# Altium PCB ESP32 with USBC V1I1.PcbDoc (part 3 of 3)
Units mil, origin at the board's own origin, x right, y up, seen from the top; angles counter-clockwise.
Board outline 2700 x 1000 mil, 4 copper layers (L1, L2, L3, L4), stack 61.583 mil thick; 64 components, 73 nets, 299 pads, 159 vias.
Unrouted connection lines stored in the file: 15.
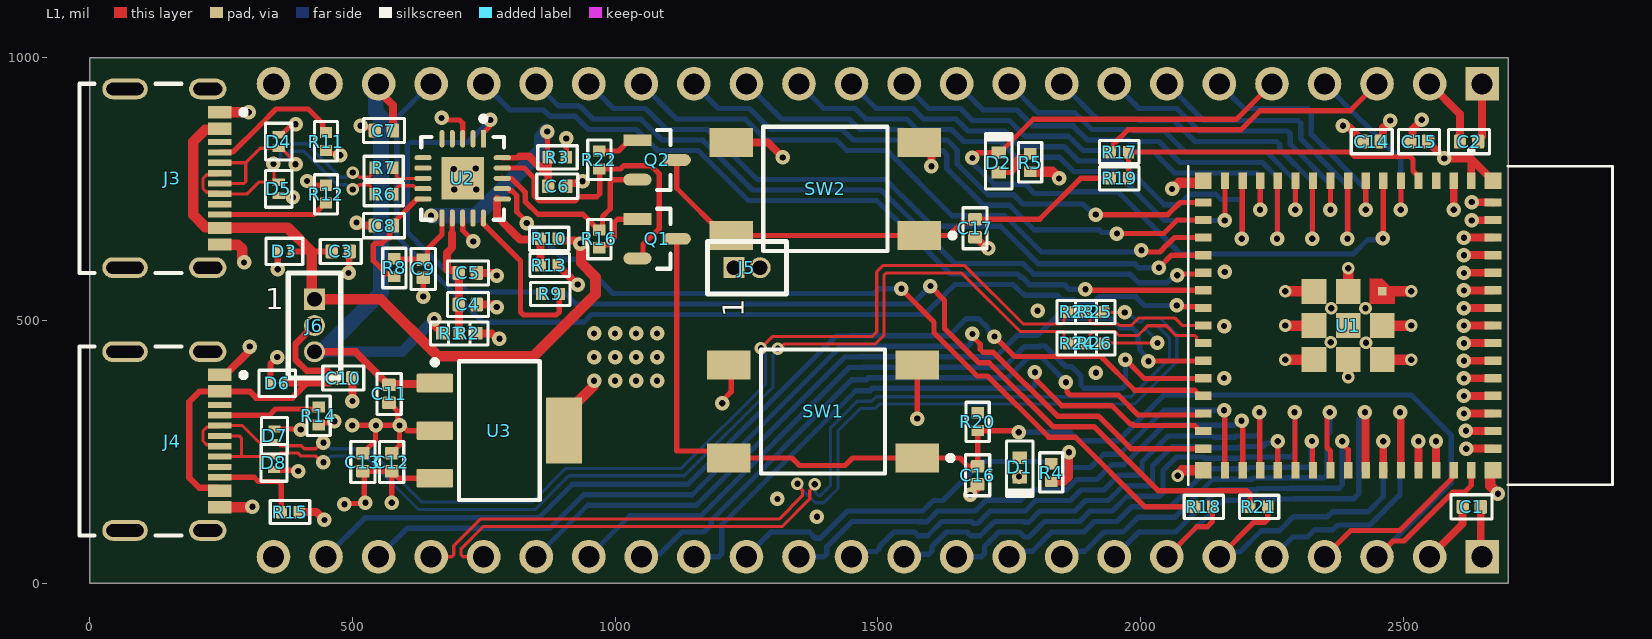
[diagram p0: L1 view]

## Via types
v1: diameter 27.56, hole 11.81, L1 to L4, tented both sides, 140 vias
v2: diameter 24, hole 12, L1 to L4, tented both sides, 19 vias

## Nets (pads, with @x,y where several pads share a name; then routed paths per layer and width w, separated by ;. In a path a pad name is that pad's centre, name@x,y a point inside that pad or via, vN(x,y) a via of type N, cw(c..) or ccw(c..) an arc to the next point about the centre after c; other vN are vias at no path point) (continued)
GPIO1: J1.4 U1.5 | length 355.7
  L1 w10: v1@2495,710 v1(2495.22,710.22) 2495.43,710.43 U1.5
  L4 w10: J1.4 2495.22,804.78 v1(2495.22,710.22)
GPIO2: D2.1 J1.5 U1.6 | length 1615
  L1 w10: v1(1680,809) 1689.7,818.7 D2.1 1731.97,818.7 1795.86,882.59 2182.59,882.59 J1.5 ; v1@2461.97,656.57 U1.6
  L4 w10: v1(1680,809) 1683.36,805.64 1683.36,796.14 1685.6,793.9 1720.5,759 1779.82,759 1797.6,741.22 1856.92,741.22 1860.38,744.68 1957.32,744.68 2075.78,626.22 2405.39,626.22 2432.4,653.24 2458.63,653.24 v1(2461.18,655.79)
GPIO3: J1.6 U1.7 | length 481.8
  L1 w10: v1@2428.5,710.43 U1.7
  L4 w10: J1.6 2197,903 2319.14,903 2325,897.14 2325,853.28 2428.29,750 v1(2428.29,710.22)
GPIO4: J1.7 U1.8 | length 652.3
  L1 w10: v1(2393.46,655) 2394.25,655.79 U1.8@2394.25,764.8
  L4 w10: J1.7 2120,880 2299.14,880 2305,874.14 2305,845 2393.46,756.54 v1(2393.46,655)
GPIO5: J1.8 U1.9 | length 606.5
  L1 w10: U1.9@2360.79,764.8 U1.9 v1@2361.57,710.43
  L4 w10: J1.8 1997,903 2068.72,903 2111.72,860 2279.14,860 2285,854.14 2285,835 2361.36,758.64 v1(2361.36,710.22)
GPIO6: J1.9 U1.10 | length 776.6
  L1 w10: v1@2327.32,655.79 U1.10@2327.32,764.8
  L4 w10: J1.9 1917,883 1993.42,883 1996.42,880 2063.43,880 2103.43,840 2259.14,840 2265,834.14 2265,825 2326.54,763.46 v1(2326.54,655)
GPIO7: J1.10 U1.11 | length 731.3
  L1 w10: v1@2294.65,710.43 U1.11
  L4 w10: J1.10 1805,895 1822.5,895 1857.5,895 1875,895 1907,863 1985.14,863 1988.14,860 2045,860 2085,820 2240,820 2294.43,765.57 v1(2294.43,710.22)
GPIO8: J1.11 U1.12 | length 909.4
  L1 w10: v1@2260.39,655.79 U1.12@2260.39,764.8
  L4 w10: J1.11 1700,900 1765,900 1795,870 1871.72,870 1898.72,843 1976.85,843 1979.85,840 2035,840 2075,800 2231.72,800 2259.61,772.11 v1(2259.61,655)
GPIO9: J1.12 U1.13 | length 869.4
  L1 w10: v1@2227.72,710.43 U1.13
  L4 w10: J1.12 1597,903 1657,903 1680,880 1750,880 1780,850 1863.43,850 1890.43,823 1968.57,823 1971.57,820 2025,820 2065,780 2221.64,780 2227.5,774.14 v1(2227.5,710.22)
GPIO10: J1.13 U1.14 | length 1031
  L1 w10: v1@2193.46,655.79 U1.14@2193.46,764.8
  L4 w10: J1.13 1497,903 1567,903 1587,883 1648.72,883 1671.72,860 1741.72,860 1771.72,830 1855.15,830 1882.15,803 1960.28,803 1963.28,800 1965,800 2045,720 2074.2,720 2094.2,740 2142.61,740 2152.61,730 2186.82,730 2192.68,724.14 v1(2192.68,655)
GPIO11: J1.14 U1.15 | length 982.2
  L1 w10: v1@2160.57,701.22 2160.79,701.44 U1.15
  L4 w10: J1.14 1397,903 1457,903 1477,883 1555,883 1575,863 1640.43,863 1663.43,840 1733.43,840 1763.43,810 1845.7,810 1872.7,783 1952,783 2045,690 v1(2160,690)
GPIO12: J1.15 U1.16 | length 997.9
  L1 w10: v1(1914.69,701) 2051.7,701 2074.95,724.25 U1.16
  L4 w10: J1.15 1317,883 1445,883 1465,863 1546.72,863 1566.72,843 1632.15,843 1651.22,823.93 1651.22,797.08 1709.3,739 1758.5,739 1776.28,721.22 1890.62,721.22 1910.84,701 v1(1914.69,701)
GPIO13: J1.16 U1.17 | length 1113.9
  L1 w10: v1(1955,665) 2043.98,665 2069.77,690.79 U1.17
  L4 w10: J1.16 1197,903 1256,903 1296,863 1433,863 1453,843 1538.43,843 1558.43,823 1623.86,823 1631.22,815.64 1631.22,788.79 1701.02,719 1750.22,719 1796.99,672.22 1921.22,672.22 1926.22,667.22 1952.78,667.22 v1(1955,665)
GPIO14: J1.17 U1.18 | length 1216
  L1 w10: v1(2001.7,633.2) 2004.9,630 2036.72,630 2050.57,643.86 2051.13,643.86 2064.59,657.32 U1.18
  L4 w10: J1.17 1117,883 1247.72,883 1287.72,843 1421,843 1441,823 1517.31,823 1641.31,699 1741.93,699 1810.93,630 1998.5,630 v1(2001.7,633.2)
GPIO15: J1.18 U1.19 | length 1324.3
  L1 w10: v1(2035,600) 2058.86,623.86 U1.19
  L4 w10: J1.18 997,903 1058,903 1098,863 1175.68,863 1270.68,768 1514.57,768 1546.57,736 1547.16,736 1604.16,679 1733.65,679 1804.87,607.78 1988.21,607.78 1995.98,600 v1(2035,600)
GPIO16: J1.19 U1.20 | length 1433.7
  L1 w10: v1(2069.73,585.71) 2072.08,588.05 2117.11,588.05 U1.20
  L4 w10: J1.19 889.07,910.93 892,908 928.9,908 ccw(c950,950) 935.8,905.19 958,883 962.14,883 1049,883 1089,843 1166.68,843 1261.68,748 1506.28,748 1538.28,716 1538.88,716 1646.66,608.22 1776.14,608.22 1796.58,587.78 1979.92,587.78 1996.48,571.22 2050.49,571.22 2064.98,585.71 v1(2069.73,585.71)
GPIO17: J1.20 U1.21 | length 1532.2
  L1 w10: v1(1895,559) 1897.07,556.93 U1.21
  L4 w10: J1.20 800,900 864,900 873.07,890.93 876,888 924.6,888 ccw(c950,950) 924.79,887.92 949.72,863 1040.72,863 1080.72,823 1158.4,823 1253.4,728 1498,728 1532,694 1532.59,694 1638.37,588.22 1765.78,588.22 1772,582 1774.08,582 1788.3,567.78 1855.22,567.78 1864,559 v1(1895,559)
GPIO18: J1.21 U1.22 | length 1980.5
  L1 w10: v1(2069,528.15) 2071.34,525.81 2117.11,525.81 U1.22
  L4 w10: J1.21 584.57,884.57 584.57,659.87 748.22,496.22 940.52,496.22 955.3,511 1589.05,511 1646.27,568.22 1757.49,568.22 1774.72,551 1776.79,551 1780.01,547.78 1841.22,547.78 1850,539 1873,539 1881.78,530.22 1906.92,530.22 1921.7,545 1990.29,545 2007.14,528.15 v1(2069,528.15)
GPIO21: J2.19 U1.25 | length 1509.6
  L1 w10: v1(2015.05,422.05) 2015.56,422.56 2117.4,422.56 U1.25@2117.91,423.07
  L4 w10: J2.19 948,148 1155.15,148 1437.15,430 1464.52,430 1465.02,430.5 1724.5,430.5 1765,471 1804.04,471 1837.04,504 1943.13,504 1961.32,485.81 1984.19,485.81 1995.5,474.5 1995.5,456.25 1998.49,453.26 1998.49,443.36 2015.05,426.8 v1(2015.05,422.05)
GPIO26: J2.18 U1.26 | length 1443.3
  L1 w10: v1(1971.2,425.21) 2007.1,389.3 U1.26@2117.43,389.3
  L4 w10: J2.18 1028,128 1163.43,128 1445.43,410 1472.8,410 1473.3,410.5 1739.52,410.5 1778.79,449.78 1807.08,449.78 1808.3,451 1817.98,451 1856.98,412 1868.7,412 1886.78,393.92 1886.78,376.36 1892.64,370.5 1965.34,370.5 1971.2,376.36 v1(1971.2,425.21)
GPIO33: J2.17 U1.28 | length 1288.7
  L1 w10: v1(1858,382) 1860.12,379.88 1860.12,363.42 1865.98,357.56 1957.44,357.56 1995.2,319.8 2116.58,319.8 U1.28
  L4 w10: J2.17 1055,55 1085,55 1127,97 1169.47,97 1183,110.53 1183,119.28 1450.72,387 1478.08,387 1481.59,390.5 1747.8,390.5 1787.08,429.78 1810.92,429.78 1858,382.7 v1(1858,382)
GPIO34: J2.16 U1.29 | length 1216.2
  L1 w10: v1(1799,401) 1802.36,397.64 1802.36,385.22 1850.02,337.56 1945.16,337.56 1980.34,302.39 1984.33,302.39 1986.91,299.8 2102.84,299.8 2108.7,293.95 2108.7,292.09 2111.57,289.21 U1.29
  L4 w10: J2.16 1197.14,50 1203,55.86 1203,111 1458,366 1485.37,366 1489.87,370.5 1793.14,370.5 1799,376.36 v1(1799,401)
GPIO35: J2.15 U1.31 | length 1157.8
  L1 w10: v1(2158.98,328.78) 2160,327.76 U1.31@2160,215.2
  L4 w10: J2.15 1297,97 1369.47,97 1381.47,85 1390,85 1442,137 1585.43,137 1605.43,157 1624.28,157 1698.58,231.3 1818.77,231.3 1830.07,220 1905,220 1930,245 1960.36,245 2044.14,328.78 v1(2158.98,328.78)
GPIO36: J2.14 U1.32 | length 1053.1
  L1 w10: v1(2192.27,308.78) 2194.25,306.79 U1.32
  L4 w10: J2.14 1397.14,50 1403,55.86 1403,69.47 1450.53,117 1577.75,117 1578.11,116.64 1593.36,116.64 1613.72,137 1685.43,137 1687.1,138.67 1687.35,138.67 1704.47,155.79 1704.47,156.03 1705.43,157 1710,157 1710.43,157.43 1772.57,157.43 1792.15,177 1858.43,177 1878.43,197 1917,197 1945,225 1968.64,225 2043.64,300 2178.73,300 2187.51,308.78 v1(2192.27,308.78)
GPIO37: J2.13 U1.33 | length 1047
  L1 w10: U1.33@2226.93,215.2 v1@2226.93,324.21
  L4 w10: J2.13 1459.86,59.86 1497,59.86 1503,65.86 1503,69.47 1530.53,97 1569.47,97 1576.47,90 1595,90 1622,117 1677.75,117 1681.59,113.16 1689.88,113.16 1695.38,118.67 1695.63,118.67 1713.96,137 1780.43,137 1800.43,157 1866.72,157 1886.72,177 1930.15,177 1958.15,205 1996.93,205 2002.78,210.86 2002.78,230.86 2051.93,280 2136.16,280 2138.77,277.39 2179.18,277.39 2181.79,280 2220.28,280 2226.14,285.86 v1(2226.14,325)
GPIO38: J2.12 U1.34 | length 889.8
  L1 w10: U1.34 v1@2261.18,269.57
  L4 w10: J2.12 1554.86,54.86 1597,54.86 1603,60.86 1603,69.47 1630.53,97 1669.47,97 1676.47,90 1695,90 1703.67,98.67 1703.92,98.67 1722.25,117 1777.75,117 1779.09,115.66 1787.38,115.66 1808.72,137 1875,137 1895,157 1938.43,157 1966.43,185 2016.93,185 2022.78,190.86 2022.78,222.57 2060.21,260 2127.88,260 2130.49,257.39 2187.47,257.39 2190.07,260 2233.28,260 2239.71,266.42 2257.6,266.42 v1(2260.96,269.78)
GPIO39: J2.11 U1.35 | length 955.6
  L1 w10: U1.35@2293.86,215.2 v1@2293.86,324.21
  L4 w10: J2.11 1697.14,50 1703,55.86 1703,69.47 1730.53,97 1769.47,97 1779.09,87.38 1787.38,87.38 1817,117 1883.72,117 1903.72,137 1946.72,137 1974.72,165 2036.93,165 2042.78,170.86 2042.78,214.29 2068.5,240 2119.6,240 2122.2,237.39 2195.75,237.39 2198.36,240 2259.47,240 2259.96,240.49 2287.21,240.49 2293.07,246.35 v1(2293.07,325)
GPIO40: J2.10 U1.36 | length 748.6
  L1 w10: v1(2326.16,269.99) 2327.14,269.02 2327.14,215.38 U1.36
  L4 w10: J2.10 1760.33,60.33 1793.86,60.33 1830.53,97 1892,97 1912,117 1955,117 1983,145 2056.72,145 2129.11,217.39 2204.03,217.39 2206.64,220 2267.75,220 2268.24,220.49 2319.14,220.49 2325,226.35 2325,268.83 v1(2326.16,269.99)
GPIO41: J2.9 U1.37 | length 805
  L1 w10: U1.37@2360.79,215.2 2361.57,215.98 2361.57,251.23 2354.94,257.86 2354.94,315.19 2360.79,321.04 v1@2360.79,324.21
  L4 w10: J2.9 1860.33,60.33 1893.86,60.33 1930.53,97 1967,97 1995,125 2065,125 2137.39,197.39 2212.32,197.39 2214.93,200 2276.03,200 2276.53,200.49 2349.08,200.49 2354.94,206.35 2354.94,281.7 2360,286.76 v1(2360,325)
GPIO42: J2.8 U1.38 | length 633.7
  L1 w10: v1(2383.72,269.78) 2383.72,265.03 2395.04,253.71 U1.38
  L4 w10: J2.8 1997,97 2067,97 2147.39,177.39 2220.6,177.39 2223.21,180 2284.32,180 2284.81,180.49 2377.86,180.49 2383.72,186.35 v1(2383.72,269.78)
GPIO45: J2.5 U1.41 | length 560.9
  L1 w15: v1(2493.86,325) 2495.06,323.8 2495.06,214.78 U1.41
  L4 w10: J2.5 2252.07,50 2289.57,87.5 2317.5,87.5 2331.25,101.25 2366.25,101.25 2375.49,110.49 2436.21,110.49 2493.86,168.14 v1(2493.86,325)
GPIO46: J2.4 U1.44 | length 320.9
  L1 w10: J2.4 2400,100 2493.28,100 2562.79,169.5 2562.79,170 2592.95,200.16 2592.95,211.54 U1.44
GPIO47: J2.23 U1.27 | length 1921
  L1 w10: v1(1722,469) 1760,431 1924.7,431 1988.97,366.73 2102.84,366.73 2108.7,360.87 2108.7,359.02 2111.57,356.14 U1.27
  L4 w10: J2.23 524,124 854.72,124 918.72,188 1138.58,188 1398.19,447.61 1420.58,470 1447.95,470 1448.45,470.5 1635.8,470.5 1668.08,502.78 1691.92,502.78 1708.78,485.92 1708.78,483.64 1722,470.42 v1(1722,469)
GPIO48: J2.22 U1.30 | length 1852.3
  L1 w10: v1(1680,474) 1680,469.25 1694.95,454.3 1694.95,444.86 1700.81,439 1720.3,439 1841.74,317.56 1919.71,317.56 1981.52,255.75 U1.30
  L4 w10: J2.22 604,104 875.72,104 939.72,168 1146.86,168 1399.86,421 1428.86,450 1456.23,450 1456.74,450.5 1671.08,450.5 1676.94,456.36 1676.94,470.94 v1(1680,474)
NetC9_1: C9.1 R8.2 U2.11 | length 151
  L1 w10: R8.2 581,616 634,616 C9.1 636.38,615 643.19,621.81 643.19,635.62 670.63,663.06 U2.11
NetD1_2: D1.2 R4.1
NetD2_2: D2.2 R5.1 | length 83.8
  L1 w10: D2.2 1754.29,781.3 1763.13,790.14 1763.13,805.52 1768.99,811.38 1784.37,811.38 R5.1
NetJ3_A5: J3.A5 R11.1 | length 261.9
  L1 w10: J3.A5 248.54,820.2 273.2,820.2 325,872 354.78,901.78 416.22,901.78 443.67,874.33 443.67,862.64 449.3,857.01 R11.1
NetJ3_B5: J3.B5 R12.1 | length 211.4
  L1 w10: J3.B5 427.01,701.18 448.82,722.99 R12.1
NetJ4_A5: J4.A5 R14.1 | length 194.9
  L1 w10: J4.A5 342.19,319.29 354.09,331.19 432.18,331.19 R14.1
NetJ4_B5: J4.B5 R15.1 | length 175.4
  L1 w10: J4.B5 313.46,201.18 321.45,193.19 325,193.19 359.14,193.19 365,187.33 R15.1
NetQ1_1: Q1.1 R16.1 | length 112.1
  L1 w10: R16.1 975.63,643.62 985.27,643.62 999.15,657.5 999.15,686.54 1005.01,692.4 Q1.1
NetQ2_1: Q2.1 R22.1 | length 81
  L1 w10: R22.1 1006.73,822.01 1027.12,842.4 Q2.1
NetR9_2: R9.2 U2.15 | length 321
  L1 w10.01: U2.15 749.37,683.29 820,612.66 820,515.86 825.86,510 888.15,510 894.02,515.86 R9.2
RTS_FTDI: Q1.2 R22.2 U2.19 | length 587.2
  L1 w10: U2.19 827.13,789.69 845.98,770.83 845.98,737.33 856.5,726.81 923.5,726.81 931.69,735 964.92,735 970.78,740.86 970.78,787.21 R22.2 ; R22.2@971.18,787.99 1010.38,787.99 1016.25,793.86 1068.91,793.86 1084.29,778.48 1084.29,674.93 1053.23,643.86 1053.23,623.38 1047.44,617.6 Q1.2
RXD_FTDI: R21.2 U2.1 | length 2268.4
  L1 w10: U2.1@749.6,856.94 760.64,867.99 760.64,879.64 v1(762.32,881.32) v1@764,883 ; v1(1600,565) 1627.08,537.92 1627.08,484.44 1692.52,419 1712.02,419 1833.45,297.56 1911.42,297.56 2033.21,175.78 2202.13,175.78 2207.99,169.92 R21.2
  L4 w10: v1(762.32,881.32) 719.11,838.11 610.43,838.11 610,837.68 604.57,832.25 604.57,668.15 637.72,635 718.95,553.78 902.52,553.78 925.3,531 1566,531 v1(1600,565)
TXD_FTDI: R18.2 U2.17 | length 1596
  L1 w10: U2.17@796.94,750.09 800.63,746.4 803.7,746.4 812.94,737.16 812.94,706.6 832,687.54 v1(832,685.01) ; v1(1545,559.78) 1545,559 1607.08,496.92 1607.08,476.16 1689.24,394 1708.73,394 1825.17,277.56 1875.71,277.56 2008.27,145 R18.2
  L4 w10: v1(832,685.01) 900.69,616.33 930.67,616.33 996,551 1493,551 1501.78,559.78 v1(1545,559.78)
U0RXD: J2.6 R21.1 U1.40 | length 665.5
  L1 w10: J2.6 2215,115 2236.15,115 2242.01,120.86 R21.1
  L1 w15: v1(2461.75,269.78) 2461.86,269.68 2461.86,214.52 U1.40
  L4 w10: J2.6 2159.38,59.38 2189.37,59.38 2229.5,99.5 2264.5,99.5 2291.25,126.25 2355.9,126.25 2365.14,135.49 2432.93,135.49 2461.75,164.32 v1(2461.75,269.78)
U0TXD: J2.7 R18.1 U1.39 | length 829.1
  L1 w10: J2.7 2107,107 2127.14,107 2137.01,116.87 R18.1
  L1 w15: v1(2426.93,325) 2428.13,323.8 2428.13,214.78 U1.39
  L4 w10: J2.7 2157.39,157.39 2228.89,157.39 2231.49,160 2292.6,160 2293.1,160.49 2406.21,160.49 2415,169.28 2415,309.93 2426.93,321.86 v1(2426.93,325)
VBUS_SENSE: R10.1 R13.2 U2.16 | length 184.6
  L1 w15: U2.16@775.02,730.63 775.02,697.81 819,653.84 819.1,653.73 856.73,653.73 R10.1 R13.2
pads on no net: J1.24 J3.A8 J3.B8 J4.A8 J4.B8 U2.2 U2.4 U2.5 U2.6 U2.7 U2.14
copper on no net:
  other v1: 1915,400

## Polygon pours and split planes (outlines as drawn)
GND on L3 (split plane): 2679.9,20.1 20.1,20.1 20.1,979.9 2679.9,979.9

## Text inside footprints (layer, text, board x,y; h text height)
J1: Bottom Overlay "1" at 2631,856 h40 r270
J2: Bottom Overlay "1" at 2631,-44 h40 r270
J5: Top Overlay "1" at 1245,506 h40 r90
J6: Top Overlay "1" at 334,521 h40